# Altium PCB PCB_hEART-led_2026-05-04.pcbdoc
Units mil, origin at the board's own origin, x right, y up, seen from the top; angles counter-clockwise.
Board outline 9284.06 x 7509.06 mil, 2 copper layers (Top Layer, Bottom Layer); 13 components, 32 nets, 82 pads, 3 vias.
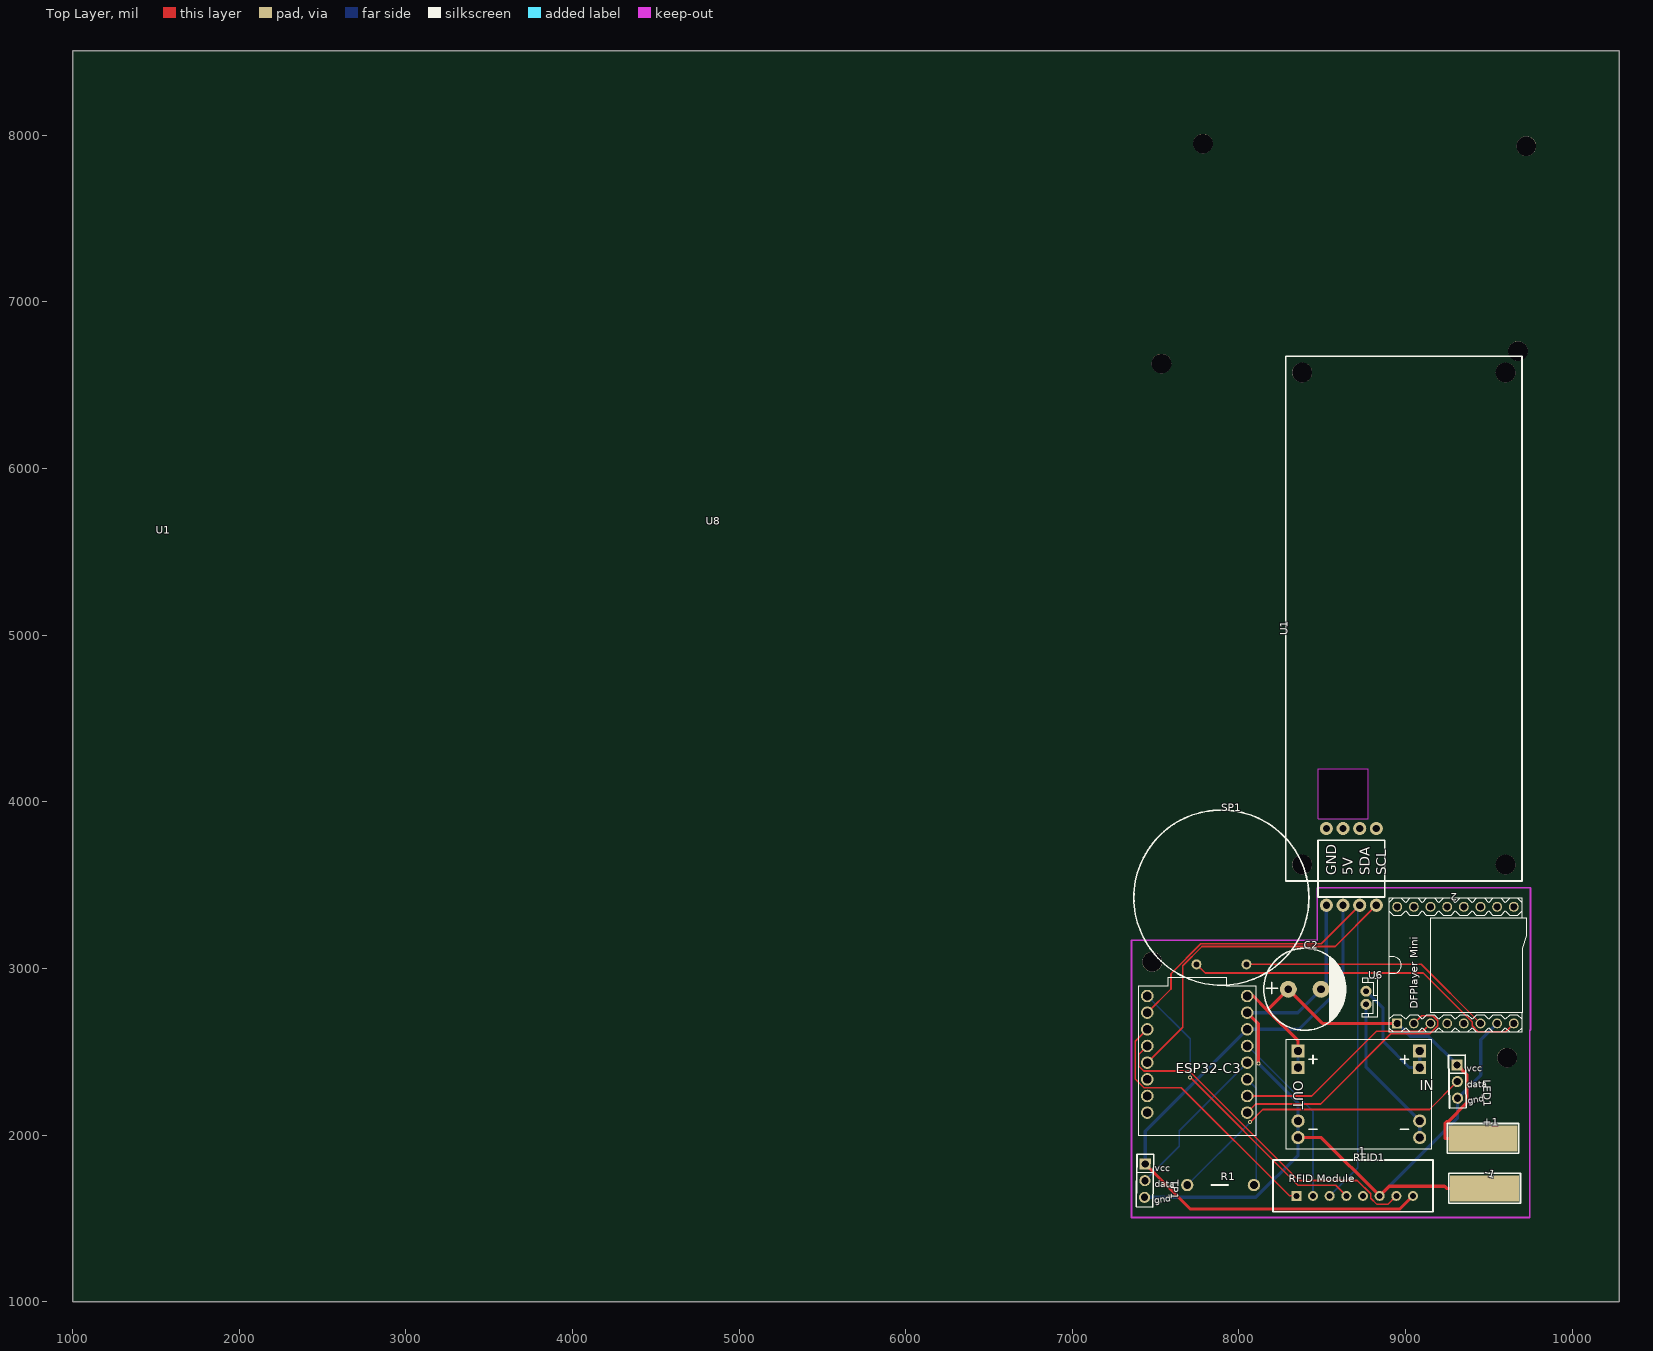
[diagram p0: Top Layer view]
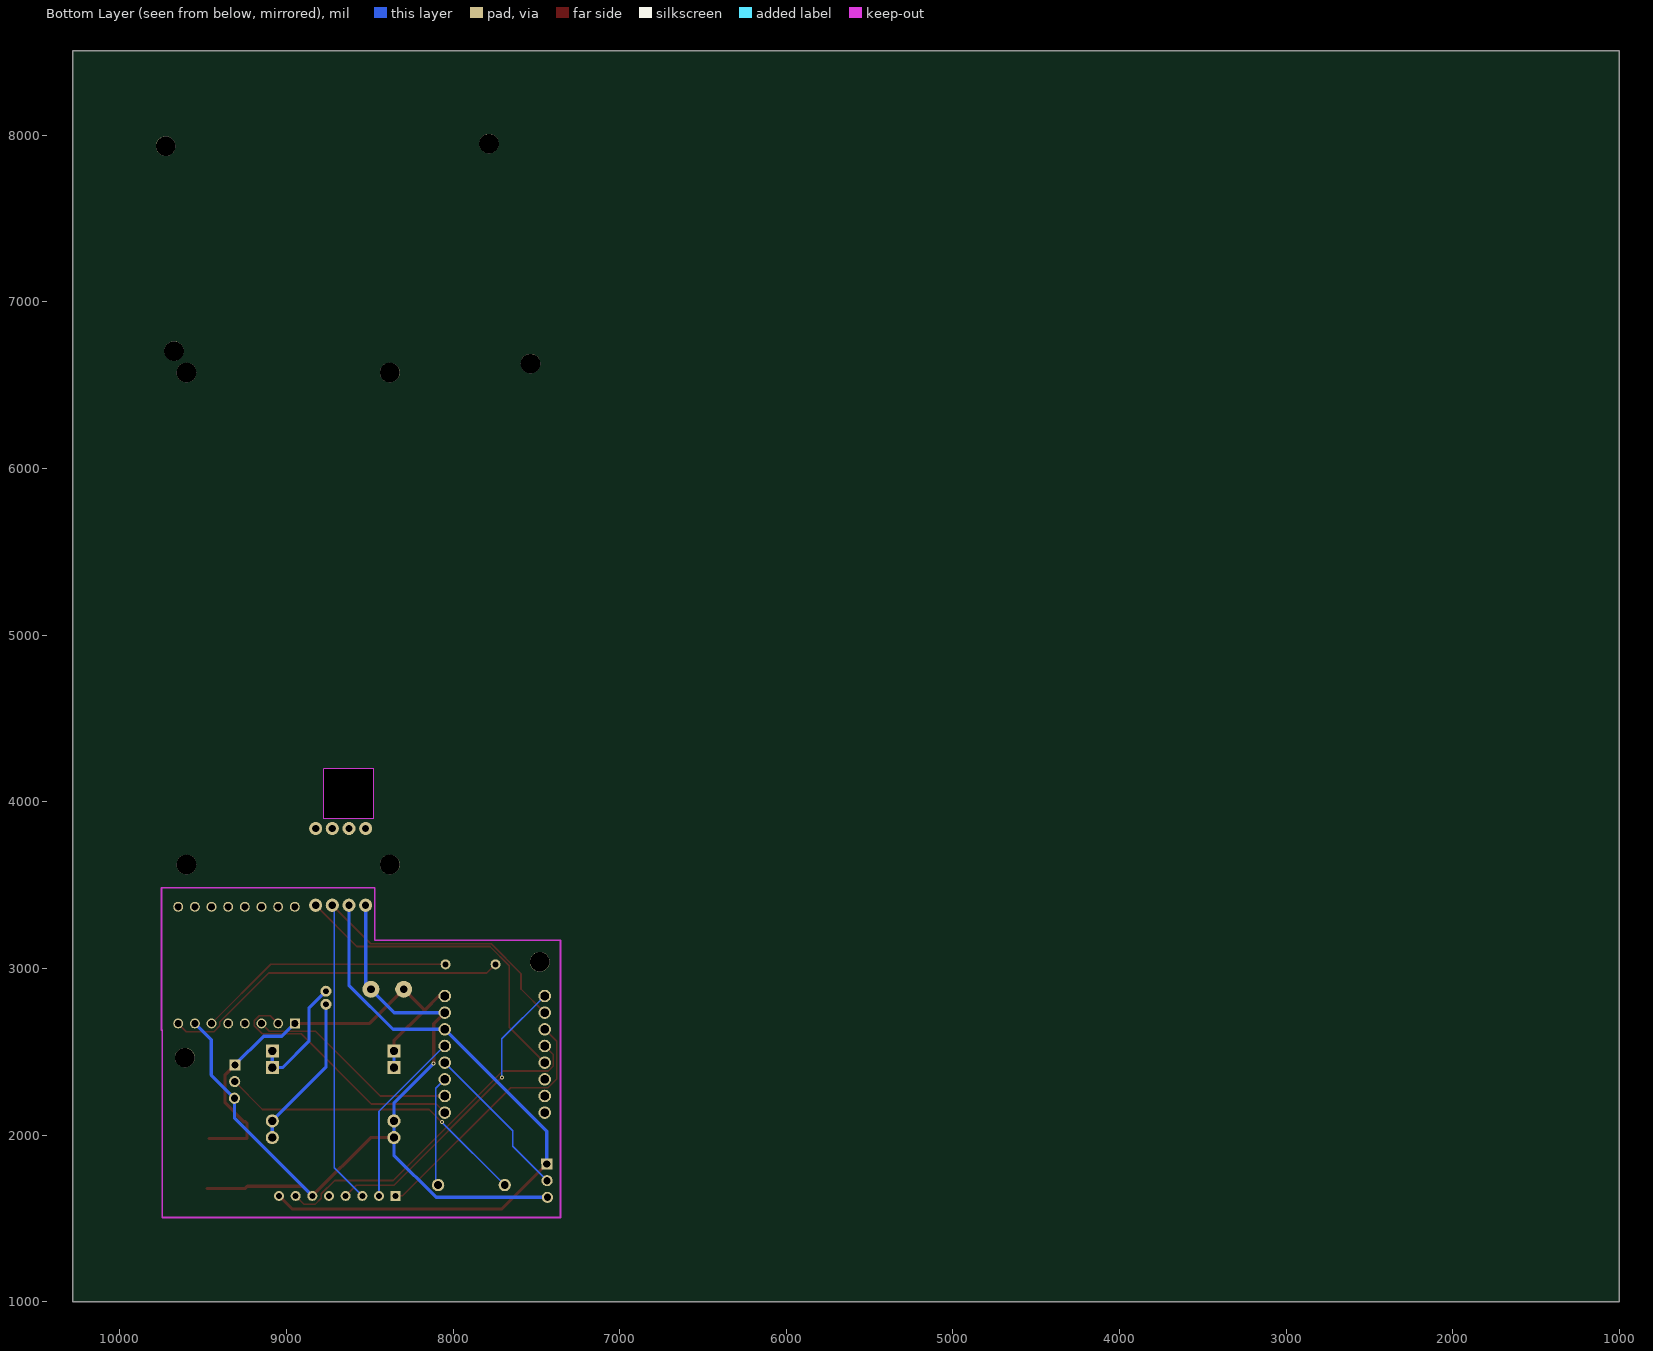
[diagram p1: Bottom Layer view, seen from below]

## Layer stack, top to bottom
Top Layer: signal copper (thickness not stored)
Dielectric: dielectric 12.6, FR-4, Dk 4.8
Bottom Layer: signal copper (thickness not stored)

## Board outline
10284.06,1000 1000,1000 1000,8509.06 10284.06,8509.06

## Components (designator, comment, footprint, x,y, rotation, side; value= is the part's Value field where it differs from the comment)
1 "DC-DC-STEP-DOWN-MP1584" DC-DC-STEP-DOWN-MP1584 8720,2245 r180 top
2 "DFPLAYER-MINI-MODULE" DFPLAYER-MINI-MODULE 9300,3020 r0 top
+1 "COPPER3.5X10" SMD_L10.0-W3.5 9465,1980 r0 top
-1 "COPPER3.5X10" SMD_L10.0-W3.5 9475,1680 r0 top
C2 "1000uF" SARAWUT_C1000UF 8395,2875 r0 top
LED1 "THREE PIN PINHEADER" "THREE PIN PINHEADER" 9320,2320 r271 top
R1 "ResistorToday" "FIXED RESISTOR" 7885,1700 r0 top
RFID1 "RC522 COPY" RFID-RC522 9045,1635 r0 top
SP1 "Speaker" SPEAKER 7895,3425 r0 top
TP1 "THREE PIN PINHEADER" "THREE PIN PINHEADER" 7445,1725 r269 top
U1 "LCD_Display_2x16_I2C" LCD_DISPLAY_2X16_I2C 8990,5100 r90 top
U6 "JST PH2" JST-PH-JST-PH2 8735,2840 r0 top
U8 "ESP32C3-SuperMini" ESP32-C3_SUPERMINI:MODULE_ESP32-C3_SUPERMINI 7750,2445 r0 top

## Footprints (in the part's own frame and the unit in brackets; to place one, negate y for a bottom-side part, rotate by r counter-clockwise, add the part's x,y. Pads: shape width x height; smd on the part's side, far side on the other; paste and mask are expansions set on the pad)
DC-DC-STEP-DOWN-MP1584 [mil]
  rect 78.74x78.74 hole 47.24 slot 47.44 at 0 deg paste+0 mask+2: IN+.1(-365,-160) IN+.2(-365,-260) OUT+.1(365,-160) OUT+.2(365,-260)
  round 78.74 hole 47.24 slot 47.44 at 0 deg paste+0 mask+2: IN-.1(-365,260) IN-.2(-365,160) OUT-.1(365,260) OUT-.2(365,160)
  silkscreen extent -435,-330 435,330
DFPLAYER-MINI-MODULE [mil]
  rect 59.37x59.37 hole 39.36 paste+0 mask+2: 1(-350,-350)
  round 59.37 hole 39.36 paste+0 mask+2: 2(-250,-350) 3(-150,-350) 4(-50,-350) 5(50,-350) 6(150,-350) 7(250,-350) 8(350,-350) 9(350,350) 10(250,350) 11(150,350) 12(50,350) 13(-50,350) 14(-150,350) 15(-250,350) 16(-350,350)
  silkscreen extent -400,-400 425,400
ESP32-C3_SUPERMINI:MODULE_ESP32-C3_SUPERMINI [mil]
  round 75 hole 50 slot 50.2 at 0 deg paste+0 mask+2: 1(-300,389.76) 2(-300,289.76) 3(-300,189.76) 4(-300,89.76) 5(-300,-10.24) 6(-300,-110.24) 7(-300,-210.24) 8(-300,-310.24) 9(300,-310.24) 10(300,-210.24) 11(300,-110.24) 12(300,-10.24) 13(300,89.76) 14(300,189.76) 15(300,289.76) 16(300,389.76)
  silkscreen extent -354,-447 354,498
"FIXED RESISTOR" [mil]
  round 74 hole 47.2 paste+0 mask+2: 1(-195,0) 2(205,0)
  silkscreen extent -50,0 50,0
JST-PH-JST-PH2 [mil]
  round 66 hole 32 slot 32.2 at 90 deg paste+0 mask+2: 1(28.2,23.35) 2(28.2,-55.25)
  silkscreen extent 5,-132 95,100
LCD_DISPLAY_2X16_I2C [mm]
  round 2 hole 1.1 paste+0 mask+0.051: 1(-43.704,11.811) 1(-32.004,11.811) 2(-43.704,9.271) 2(-32.004,9.271) 3(-43.704,6.731) 3(-32.004,6.731) 4(-43.704,4.191) 4(-32.004,4.191)
  round 3 hole 3 unplated paste+0: ""(-37.5,-15.5) ""(-37.5,15.5) ""(37.5,-15.5) ""(37.5,15.5)
  Keep-Out Layer lines w0.127: -30.48,13.081 -30.48,5.461 -22.86,5.461 -22.86,13.081 -30.48,13.081
  Multi-Layer board cut-out: -30.48,13.081 -30.48,5.461 -22.86,5.461 -22.86,13.081
  silkscreen extent -42.43,-18 40,18
RFID-RC522 [mil]
  round 60 hole 36 paste+0 mask+4: 1(0,0)
  round 60 hole 36 paste+0 mask+2: 2(-100,0) 3(-200,0) 4(-300,0) 5(-400,0) 6(-500,0) 7(-600,0)
  rect 60x60 hole 36 paste+0 mask+4: 8(-700,0)
  silkscreen extent -840,-95 120,215
SARAWUT_C1000UF [mm]
  round 2.6 hole 1.2 paste+0 mask+0.05: 1(-2.5,0) 2(2.5,0)
  silkscreen extent -6.25,-6.25 6.25,6.25
SMD_L10.0-W3.5 [mm]
  rect 10.5x4 smd paste+0 mask+0.05: 1(0,0)
  silkscreen extent -5.46,-2.29 5.46,2.29
SPEAKER [mil]
  round 60 hole 36 paste+0 mask+2: 1(150,-400) 2(-150,-400)
  silkscreen extent -526,-526 526,526
"THREE PIN PINHEADER" [mm]
  rect 1.7x1.7 hole 1.1 paste+0 mask+0.051: 1(-2.572,-0.23)
  round 1.7 hole 1.1 paste+0 mask+0.051: 2(-0.032,-0.23) 3(2.508,-0.23)
  silkscreen extent -4.05,-1.5 3.99,1.04

## Free pads (board coordinates)
  round 118.11 hole 118.11 unplated paste+0: ""(7480,3040) ""(7535,6630) ""(7785,7950) ""(9610,2465) ""(9675,6705) ""(9725,7935)

## Via types
v1: diameter 24.02, hole 12.01, Top Layer to Bottom Layer, tented both sides, 3 vias

## Nets (pads, with @x,y where several pads share a name; then routed paths per layer and width w, separated by ;. In a path a pad name is that pad's centre, name@x,y a point inside that pad or via, vN(x,y) a via of type N, cw(c..) or ccw(c..) an arc to the next point about the centre after c; other vN are vias at no path point)
2_4: 2.4
2_5: 2.5
2_6: 2.6 SP1.1 | length 1552
  Top Layer w10: SP1.1 9095,3025 2.6
2_8: 2.8 SP1.2 | length 2106.3
  Top Layer w10: SP1.2 7797.46,2972.54 9106.66,2972.54 9400,2679.2 9400,2655.94 9434.93,2621.01 9601.01,2621.01 2.8
2_9: 2.9
2_10: 2.10
2_11: 2.11
2_12: 2.12
2_13: 2.13
2_14: 2.14
2_15: 2.15
2_16: 2.16
R1_1: LED1.2 R1.1 | length 1878.2
  Top Layer w10: v1(8067.24,2077.24) 8143.75,2153.75 9143.57,2153.75 LED1.2
  Bottom Layer w10: R1.1 v1(8067.24,2077.24)
RFID1_1: RFID1.1 TP1.1 U1.2 U8.14 | length 3978.4
  Top Layer w19.68: TP1.1 7707.68,1556.43 8966.43,1556.43 RFID1.1
  Bottom Layer w19.68: TP1.1 7437.71,2022.47 U8.14 8360.66,2634.76 8625,2899.1 U1.2@8625,3379.37
RFID1_2: RFID1.2 U8.4 | length 2068.1
  Top Layer w10: U8.4 7398.46,2483.22 7398.46,2414.73 7428.43,2384.76 7702,2384.76 8359.55,1727.21 8710.87,1727.21 8790.92,1647.16 8790.92,1621.76 8828.76,1583.92 8893.92,1583.92 RFID1.2
RFID1_3: 1.OUT-.1 1.OUT-.2 2.7 -1.1 C2.2 LED1.3 RFID1.3 TP1.3 U1.1 U8.15 | length 5646.8
  Top Layer w19.68: U8.15 8116.25,2668.51 v1(8116.25,2430.19) ; 1.OUT-.1 8495,1985 RFID1.3 8902.26,1692.26 9234.38,1692.26 9246.64,1680 -1.1
  Bottom Layer w19.68: TP1.3 8101.75,1626.43 8355,1879.68 1.OUT-.1 1.OUT-.2 8355,2191.44 v1(8116.25,2430.19) ; U8.15 8353.18,2734.76 C2.2 8525,2906.58 U1.1@8525,3379.37 ; RFID1.3 9312.67,2102.67 LED1.3 9452.06,2360.51 9452.06,2572.06 2.7
RFID1_4: RFID1.4
RFID1_5: RFID1.5 U8.1 | length 1827.1
  Top Layer w10: v1(7707.52,2346.62) 8354.87,1699.27 8580.73,1699.27 RFID1.5
  Bottom Layer w10: U8.1 7707.52,2577.24 v1(7707.52,2346.62)
RFID1_6: RFID1.6 U1.3 U8.2 | length 3414.5
  Top Layer w10: U8.2 7592.5,2877.26 7592.5,2968.71 7771.83,3148.04 8493.67,3148.04 U1.3@8725,3379.37
  Bottom Layer w10: RFID1.6 8713.36,1803.36 8713.36,3367.73 U1.3@8725,3379.37
RFID1_7: RFID1.7 U8.13 | length 1064.8
  Bottom Layer w10: U8.13 8052.47,2534.76 8445,2142.23 RFID1.7
RFID1_8: RFID1.8 U8.3 | length 1585
  Top Layer w10: U8.3 7378.59,2563.35 7378.59,2336.24 7430.07,2284.76 7654.25,2284.76 8304.01,1635 RFID1.8
U6_1: 1.IN+.1 1.IN+.2 U6.1 | length 727.4
  Bottom Layer w19.68: U6.1 8865.16,2761.39 8865.16,2563.8 9023.96,2405 1.IN+.1 1.IN+.2
U6_2: 1.IN-.1 1.IN-.2 U6.2 | length 933
  Bottom Layer w19.68: U6.2 8763.2,2406.8 1.IN-.2 1.IN-.1
U8_5: U1.4 U8.5 | length 1982.1
  Top Layer w10: U8.5 7662.25,2647.01 7662.25,3015.46 7778.77,3131.98 8577.61,3131.98 U1.4@8825,3379.37
U8_6: U8.6
U8_7: U8.7
U8_8: U8.8
U8_9: 2.2 U8.9 | length 1566
  Top Layer w10: U8.9 8101.44,2186.2 8490.69,2186.2 8911.91,2607.42 9145.71,2607.42 9193.78,2655.49 9193.78,2686.41 9163.59,2716.6 9096.6,2716.6 2.2
U8_10: 2.3 U8.10 | length 1280.3
  Top Layer w10: U8.10 8436.97,2234.76 8825.69,2623.48 9103.48,2623.48 2.3
U8_11: R1.2 U8.11 | length 662.6
  Bottom Layer w10: U8.11 8103.66,2281.1 8103.66,1713.66 R1.2
U8_12: TP1.2 U8.12 | length 962.7
  Bottom Layer w10: TP1.2 7641.94,1932.4 7641.94,2026.7 U8.12
U8_16: 1.OUT+.1 1.OUT+.2 2.1 +1.1 C2.1 LED1.1 U8.16 | length 2708.8
  Top Layer w19.68: U8.16 8086.28,2834.76 8171.31,2749.74 ; 1.OUT+.2 8355,2566.04 8171.31,2749.74 ; 2.1 8501.57,2670 C2.1 8171.31,2749.74 ; LED1.1 9368.83,2361.44 9368.83,2193.57 9255.67,2080.41 9247.51,2080.41 9236.64,2069.54 9236.64,1980 +1.1
  Bottom Layer w19.68: 1.OUT+.1 1.OUT+.2 ; 2.1 9027.04,2592.96 9137.31,2592.96 LED1.1
pads on no net: U1.

## Text inside footprints (layer, text, board x,y; h text height)
1: Top Overlay "IN" at 9085,2269 h60; Top Overlay "OUT" at 8325,2326 h60 r270
2: Top Overlay "DFPlayer Mini" at 9072.5,2756.75 h45 r90
LED1: Top Overlay "vcc" at 9368.94,2381.18 h39.37 r1; Top Overlay "data" at 9370.65,2282.76 h39.37 r1; Top Overlay "gnd" at 9375.45,2184.65 h39.37 r10
RFID1: Top Overlay "RFID Module" at 8300,1700 h80
TP1: Top Overlay "vcc" at 7496.05,1784.43 h39.37 r359; Top Overlay "data" at 7494.33,1686.02 h39.37 r359; Top Overlay "gnd" at 7495.69,1587.8 h39.37 r8
U1: Top Overlay "GND" at 8584.53,3560 h59.05 r90; Top Overlay "5V" at 8684.53,3560 h59.05 r90; Top Overlay "SDA" at 8784.53,3560 h59.05 r90; Top Overlay "SCL" at 8884.53,3560 h59.05 r90
U8: Top Overlay "U1" at 1500,5610 h45; Top Overlay "ESP32-C3" at 7620,2370 h59.06